# EAGLE board Bench SMPS (EAGLE 6.2)

Size 100 x 80 mm. Coordinates in mm from the lower left corner, seen from the top.
Outline: 0,0 100,0 100,80 0,80 0,0
Copper layers (1*16): Top 0.035mm / dielectric 1.5mm / Bottom 0.035mm
Design rules: minimum track width 10mil, minimum drill 24mil, track to track 8mil, track to pad 8mil, pad to pad 8mil, via to via 8mil, smd to smd 8mil, copper to edge 40mil, drill to drill 8mil, minimum pad ring 10mil, minimum via ring 8mil, stop-mask expansion 4mil, vias tented up to drill 0mil, thermal gap 10mil

## Footprints (pad centres in the part's own frame; a part is rotated, then mirrored left to right if it is on the bottom)
DIL14 = drill 0.813 long: 1 -7.62,-3.81; 2 -5.08,-3.81; 3 -2.54,-3.81; 4 0,-3.81; 5 2.54,-3.81; 6 5.08,-3.81; 7 7.62,-3.81; 8 7.62,3.81; 9 5.08,3.81; 10 2.54,3.81; 11 0,3.81; 12 -2.54,3.81; 13 -5.08,3.81; 14 -7.62,3.81
KIS-3R33S = smd 4.5 x 1.2: ADJ 10.2,7.95; GND -10.2,-7.95; GND1 10.2,-7.95; ON/OFF -10.2,7.95; VIN -10.2,-1.95; VOUT 10.2,1.95; VOUT1 10.2,0.45

## Placement (x,y rotation side)
IC1  LM747AN  [DIL14]  -22.86,27.94 0 top  (outside the outline)
U$1  KIS-3R33S  [KIS-3R33S]  -25.4,11.43 0 top  (outside the outline)

## Library data of the parts
IC1 = linear
U$1 = RobThePyro

## Nets
V+: IC1.9 IC1.13
V-: IC1.4

## Tracks (layer width: path | path; a pad name or v marks a point on that pad's centre or on a via)
V+  (1 unrouted)